# Altium PCB Relay.PcbDoc
Units mm, origin at the board's own origin, x right, y up, seen from the top; angles counter-clockwise.
Board outline 40.88 x 23.94 mm, 2 copper layers (Top Layer, Bottom Layer); 12 components, 9 nets, 26 pads, 49 vias.
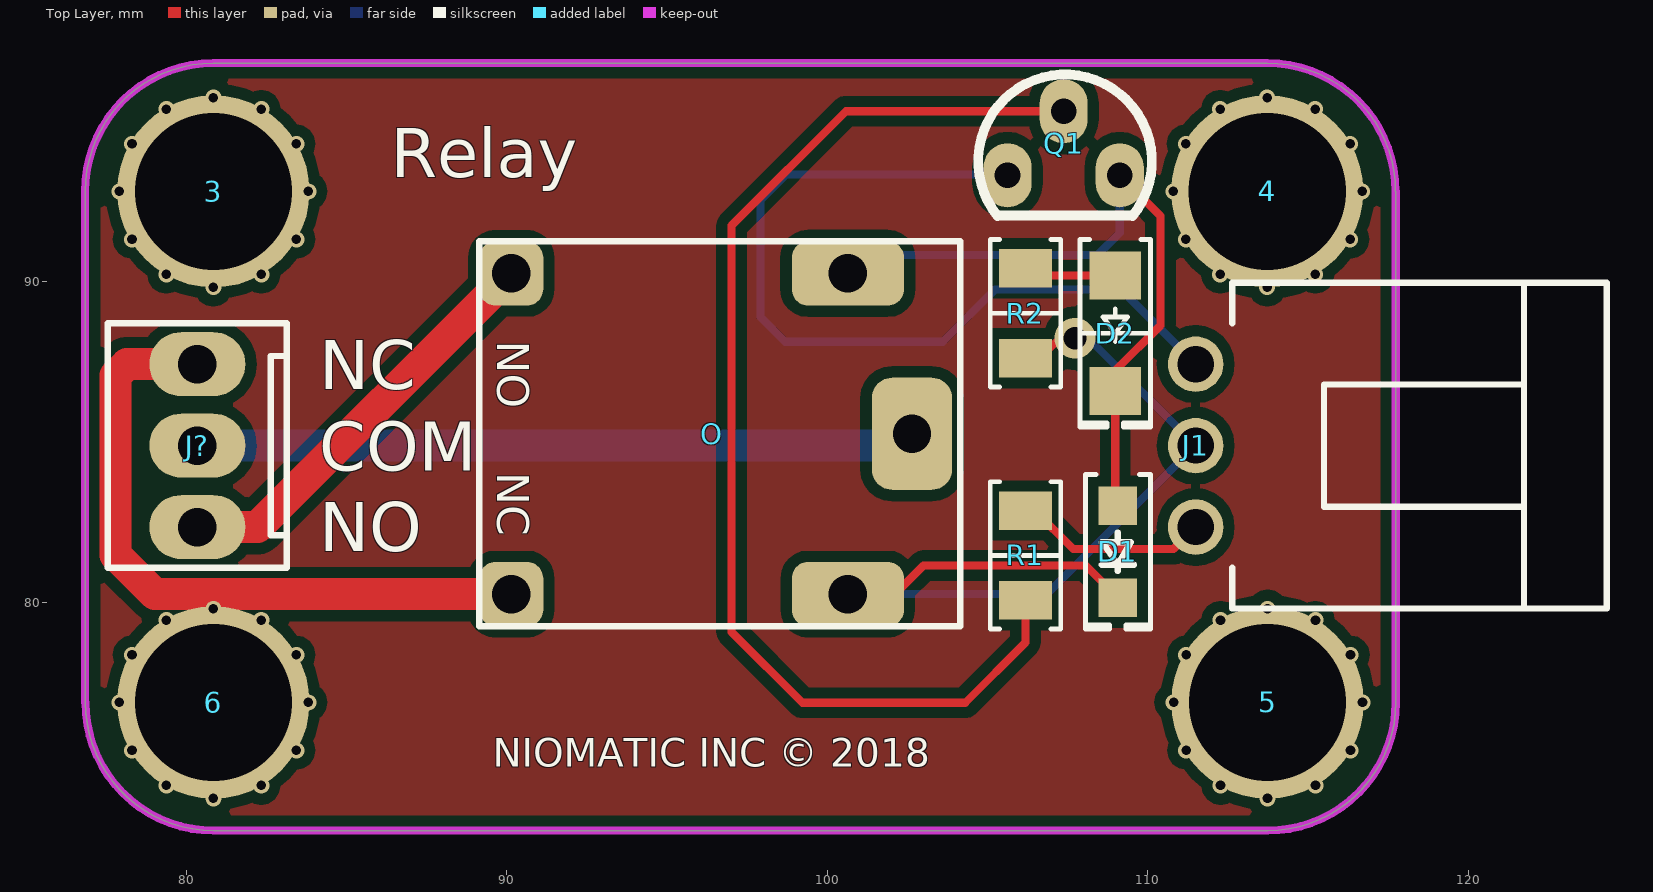
[diagram p0: Top Layer view]
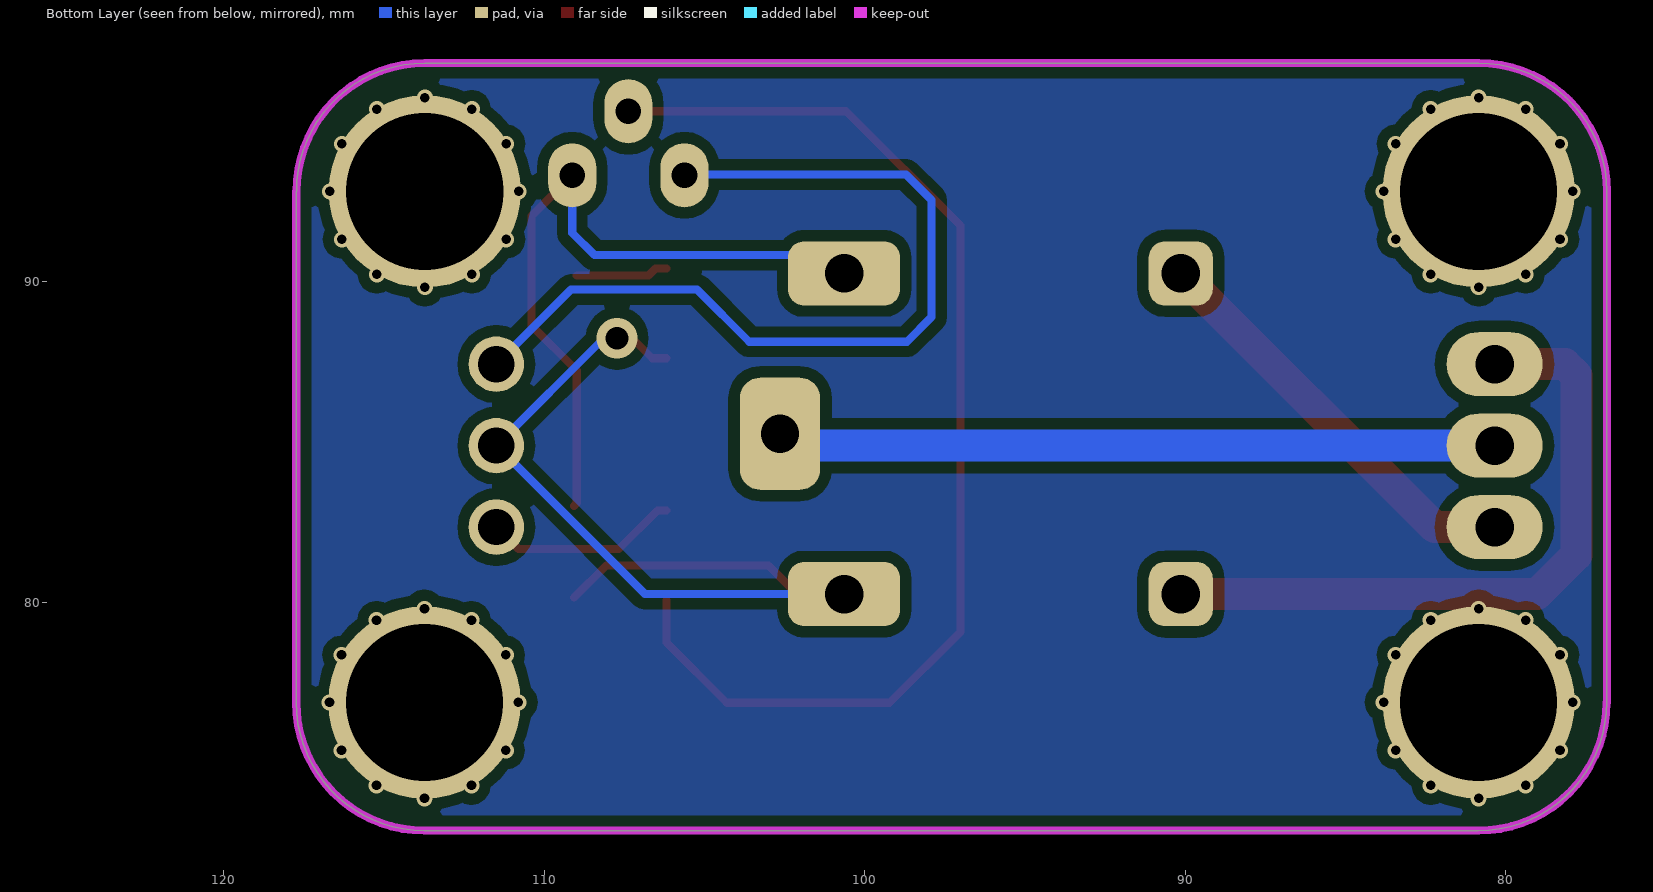
[diagram p1: Bottom Layer view, seen from below]
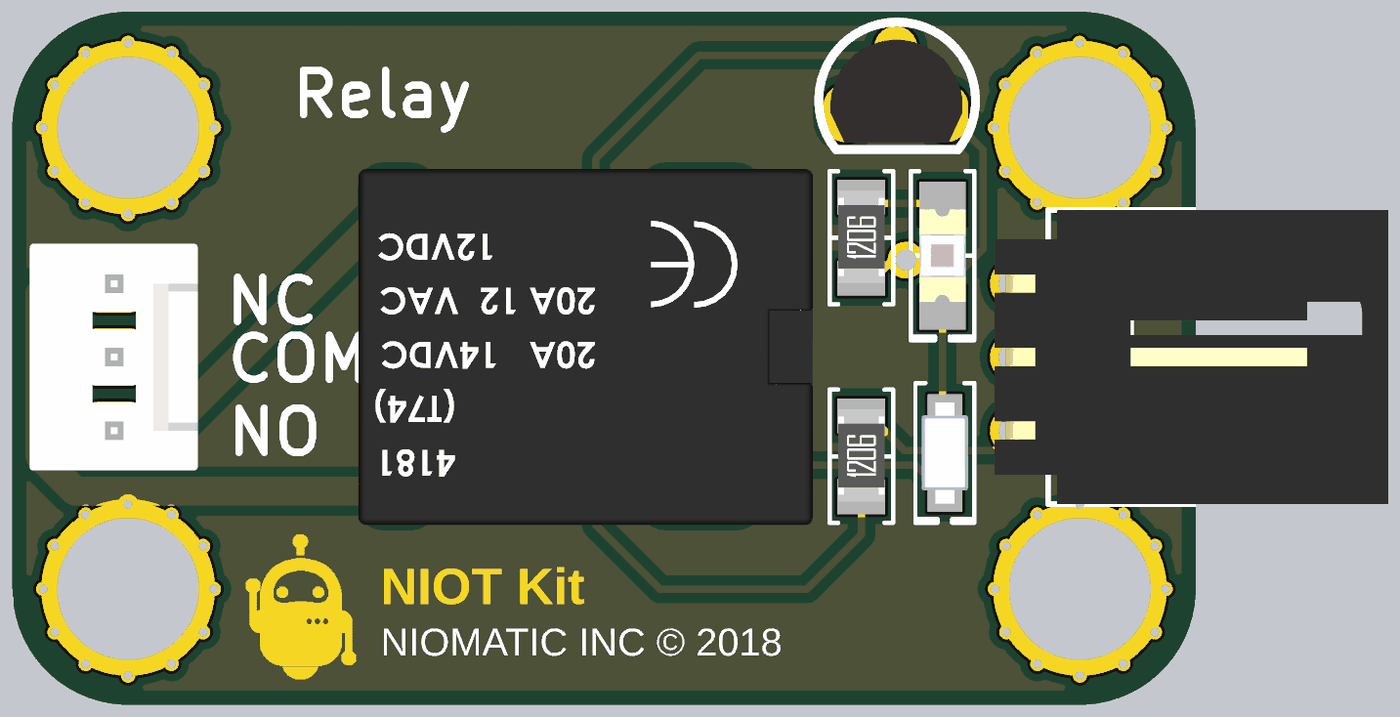
[diagram p2: 3D render of the assembled board from above, using the file's embedded part models]

## Layer stack, top to bottom
Top Solder: solder mask 0.0102, Solder Resist, Dk 3.5
Top Layer: signal copper 0.0356
Dielectric 1: dielectric 0.32, FR-4, Dk 4.8
Bottom Layer: signal copper 0.0356
Bottom Solder: solder mask 0.0102, Solder Resist, Dk 3.5

## Board outline
76.85,76.88 76.85,92.82 cw(c80.85,92.82) 80.85,96.82 113.72,96.82 cw(c113.72,92.82) 117.72,92.82 117.729,92.82 117.729,76.88 cw(c113.729,76.88) 113.729,72.88 80.859,72.88 cw(c80.859,76.88)

## Design rules (kind name [scope] priority, off if disabled: settings)
Clearance "New rules" [IsRegion] p1: gap=0.35
Clearance [All] p2: gap=0.254
PolygonConnect [All] p1: connectstyle=Relief reliefconductorwidth=0.254 reliefentries=4 polygonreliefangle="90 Angle" airgapwidth=0.254
RoomDefinition PhotoResistor [InComponentClass('PhotoResistor')] p1: confinementstyle=ConfineIn formatcopy=TRUE lockcomponents=FALSE outline 178.943,26.924 198.247,26.924 198.247,44.577 178.943,44.577
RoutingVias [All] p1: holewidth=0.711 width=1.27 viastyle="Through Hole" minholewidth=0.711 minwidth=1.27 maxholewidth=0.711 maxwidth=1.27
SolderMaskExpansion [All] p1: expansion=0.102
Width [All] p1: maxlimit=100 minlimit=0.254 preferedwidth=0.254
30 further rules are at their usual default settings.

## Classes and differential pairs
component class PhotoResistor: D1 D2 J1 J? O Q1 R1 R2

## Components (designator, comment, footprint, x,y, rotation, side; value= is the part's Value field where it differs from the comment)
3 "Lego" "Lego Hole" 80.85,92.82 r90 top
4 "Lego" "Lego Hole" 113.72,92.82 r90 top (schematic designator 3)
5 "Lego" "Lego Hole" 113.73,76.88 r90 top (schematic designator 3)
6 "Lego" "Lego Hole" 80.849,76.88 r90 top (schematic designator 3)
D1 "=\"Part Number\"" SOD123F 109.064,81.578 r270 top
D2 "Green" "LED 1206/3216 RED" 108.98,88.394 r270 top
J1 "Header" "MOLEX SDA-70553-3PIN" 117.71,84.89 r270 top
J? "Header" "MOLEX KK 0022272031" 80.35,84.89 r90 top
O "12V SMALL" Relay_5_Small 96.39,85.26 r270 top
Q1 "2N2222" T4-TO92 106.12,93.57 r90 top
R1 "1K" "RES 1206/3216" 106.18,81.465 r90 top
R2 "1K" "RES 1206/3216" 106.18,89.016 r90 top

## Footprints (in the part's own frame and the unit in brackets; to place one, negate y for a bottom-side part, rotate by r counter-clockwise, add the part's x,y. Pads: shape width x height; smd on the part's side, far side on the other; paste and mask are expansions set on the pad)
"LED 1206/3216 RED" [mm] "Chip Diode, 2-Leads, Body 3.13x1.55mm, IPC Medium Density"
  rect 1.5x1.6 smd: 1(-1.8,0) 2(1.8,0)
  silkscreen extent -2.92,-1.1 2.92,1.1, body extent -1.6,-0.8 1.6,0.8, height 0.9
"Lego Hole" [mm]
  round 6 hole 4.9: ""(0,0)
"MOLEX KK 0022272031" [mm]
  oval 2x3 hole 1.2: 1(-2.54,0) 2(0,0) 3(2.54,0)
  silkscreen extent -3.81,-2.79 3.81,2.79, body extent -3.81,-2.9 3.81,2.9, height 11.7
"MOLEX SDA-70553-3PIN" [mm] "SL Right Angle Header W/LAtch & Trip-Pegs 2.54mm Centres"
  round 1.73 hole 1.13: 1(-2.54,-6.223) 2(0,-6.223) 3(2.54,-6.223)
  silkscreen extent -5.08,-5.08 5.08,6.6, body extent -5.08,-6.92 5.08,6.67, height 6.98
Relay_5_Small [mm]
  rrect50% 2x3.5 hole 1.2: 1(5,4.25) 2(-5,4.25)
  rrect50% 3.5x2.5 hole 1.2: Com(0,6.25)
  rrect50% 2x2 hole 1.2: NC(5,-6.25) NO(-5,-6.25)
  silkscreen extent -6,-7.25 6,7.75, body extent -6.13,-7.58 6.17,8.12, height 13.71
"RES 1206/3216" [mm] "Chip Resistor, 2-Leads, Body 3.13x1.55mm, IPC Medium Density"
  rect 1.2x1.65 smd: 1(-1.4,0) 2(1.4,0)
  silkscreen extent -2.3,-1.1 2.3,1.1, body extent -1.57,-0.8 1.62,0.8, height 0.6
SOD123F [mm] "SODFL, 2-Leads, Body 1.60x3.50mm, IPC Medium Density"
  rect 1.2x1.2 smd: 1(-1.43,0) 2(1.43,0)
  silkscreen extent -2.41,-1.02 2.41,1.02, body extent -1.75,-0.8 1.75,0.8, height 1.1
T4-TO92 [mm]
  oval 2x1.5 hole 0.8: B(1.75,-1.25) C(-0.25,-3) E(-0.25,0.5)
  silkscreen extent -1.52,-4 2.89,1.41, body extent -1.27,-3.56 2.29,1.02, height 6.18

## Part data
D1: library part Diode, "Rectifier Diode"
D2: library part LED, "Chip LED"
J1 J?: library part "3 Pin"
O: library part "Small Relay"
Q1: "NPN"
R1 R2: library part Resistor, "SMT Resistor"

## Via types
v1: diameter 0.5, hole 0.3, Top Layer to Bottom Layer, 48 vias
v2: diameter 1.27, hole 0.711, Top Layer to Bottom Layer, 1 vias

## Nets (pads, with @x,y where several pads share a name; then routed paths per layer and width w, separated by ;. In a path a pad name is that pad's centre, name@x,y a point inside that pad or via, vN(x,y) a via of type N, cw(c..) or ccw(c..) an arc to the next point about the centre after c; other vN are vias at no path point)
GND: J1.1 Q1.E | length 27.3
  Bottom Layer w0.254: Q1.E 105.62,93.345 98.705,93.345 97.91,92.55 97.91,88.9 98.68,88.13 103.599,88.13 105.229,89.76 109.157,89.76 J1.1
NetD1_1: D1.1 D2.2 O.2 Q1.C | length 22.3
  Top Layer w0.254: D1.1 108.98,83.092 D2.2 108.98,87.23 110.39,88.64 110.39,92.05 Q1.C
  Bottom Layer w0.254: O.2 101.21,90.83 108.43,90.83 109.12,91.52 Q1.C
NetD2_1: D2.1 R2.2 | length 2.9
  Top Layer w0.254: R2.2 106.519,90.416 106.74,90.194 D2.1
NetJ1_3: J1.3 R1.2 | length 6.1
  Top Layer w0.254: R1.2 106.464,82.866 107.669,81.661 110.798,81.661 J1.3
NetJ?_1: J?.1 O.NO | length 13.1
  Top Layer w1: J?.1 82.23,82.35 O.NO
NetJ?_2: J?.2 O.Com | length 22.4
  Bottom Layer w0.254: O.Com@102.27,84.89 O.Com
  Bottom Layer w1: J?.2 O.Com@102.27,84.89
NetJ?_3: 6. J?.3 O.NC | length 21.1
  Top Layer w1: J?.3 78.156,87.43 77.8,87.074 77.8,81.483 79.023,80.26 O.NC
  other v1: 80.849,73.891 79.383,74.291 82.343,74.291 78.311,75.386 83.438,75.386 77.919,76.88 83.809,76.88 78.311,78.361 83.438,78.361 79.383,79.444 82.343,79.444 80.849,79.801
NetQ1_B: Q1.B R1.1 | length 36.7
  Top Layer w0.254: R1.1 106.18,78.75 104.3,76.87 99.22,76.87 97.01,79.08 97.01,91.75 100.58,95.32 Q1.B
VCC: D1.2 J1.2 O.1 R2.1 | length 28.9
  Top Layer w0.254: O.1 102.11,80.26 103.003,81.153 108.06,81.153 D1.2 ; R2.1 106.626,87.616 107.25,88.24 v2(107.721,88.24)
  Bottom Layer w0.254: O.1 106.857,80.26 J1.2 108.137,88.24 v2(107.721,88.24)
pads on no net: 3. 4. 5.
copper on no net:
  other v1: 113.73,73.891 112.264,74.291 115.225,74.291 111.192,75.386 116.319,75.386 110.8,76.88 116.69,76.88 111.192,78.361 116.319,78.361 112.264,79.444 115.225,79.444 113.73,79.801 80.85,89.831 113.72,89.831 79.384,90.231 82.344,90.231 112.254,90.231 115.214,90.231 78.312,91.326 83.438,91.326 111.182,91.326 116.309,91.326 77.92,92.82 83.81,92.82 110.79,92.82 116.68,92.82 78.312,94.301 83.438,94.301 111.182,94.301 116.309,94.301 79.384,95.384 82.344,95.384 112.254,95.384 115.214,95.384 80.85,95.741 113.72,95.741

## Polygon pours and split planes (outlines as drawn)
no net on Top Layer "Bottom Layer-No Net" (solid, pour order 6): 76.85,76.88 76.85,92.82 cw(c80.85,92.82) 80.85,96.82 113.72,96.82 cw(c113.72,92.82) 117.72,92.82 117.729,92.82 117.729,76.88 cw(c113.729,76.88) 113.729,72.88 80.859,72.88 cw(c80.854,76.885)
no net on Keep-Out Layer "Bottom Layer-No Net" (none, remove dead copper): 76.85,76.88 76.85,92.82 cw(c80.85,92.82) 80.85,96.82 113.72,96.82 cw(c113.72,92.82) 117.72,92.82 117.729,92.82 117.729,76.88 cw(c113.729,76.88) 113.729,72.88 80.859,72.88 cw(c80.859,76.88)
no net on Bottom Layer "Bottom Layer-No Net" (solid, pour order 8): 76.85,76.88 76.85,92.82 cw(c80.85,92.82) 80.85,96.82 113.72,96.82 cw(c113.72,92.82) 117.72,92.82 117.729,92.82 117.729,76.88 cw(c113.729,76.88) 113.729,72.88 80.859,72.88 cw(c80.854,76.885)

## Keep-outs
Keep-Out Layer:
  lines w0.254: 76.85,76.88 76.85,92.82 cw(c80.85,92.82) 80.85,96.82 113.72,96.82 cw(c113.72,92.82) 117.72,92.82 ; 76.859,76.88 ccw(c80.859,76.88) 80.859,72.88 113.729,72.88 ccw(c113.729,76.88) 117.729,76.88 117.729,92.82

## Silkscreen, mask and mechanical layers (free items; w line width, h text height)
Top Overlay:
  text "Relay" at 86.38,93.26 h1.52
  text "NC" at 84.15,86.65 h1.52
  text "COM" at 84.15,84.11 h1.52
  text "NO" at 84.15,81.588 h1.52
  text "NIOMATIC INC © 2018" at 89.57,74.58 h1.52
Top Solder:
  drawing of 381 lines, arcs and shapes, not listed
  text "NIOT Kit" at 89.57,76.36 h2
Bottom Solder:
  text "Sensor Design Kit" at 107.58,75.84 h1.52

## Text inside footprints (layer, text, board x,y; h text height)
O: Top Overlay "NC" at 89.71,84.066 h1 r270; Top Overlay "NO" at 89.71,88.156 h1 r270